# Altium PCB demoboard.PcbDoc (part 1 of 2)
Units mil, origin at the board's own origin, x right, y up, seen from the top; angles counter-clockwise.
Board outline 2372.23 x 2372.23 mil, 2 copper layers (Top Layer, Bottom Layer); 93 components, 94 nets, 539 pads, 0 vias.
Unrouted connection lines stored in the file: 66.
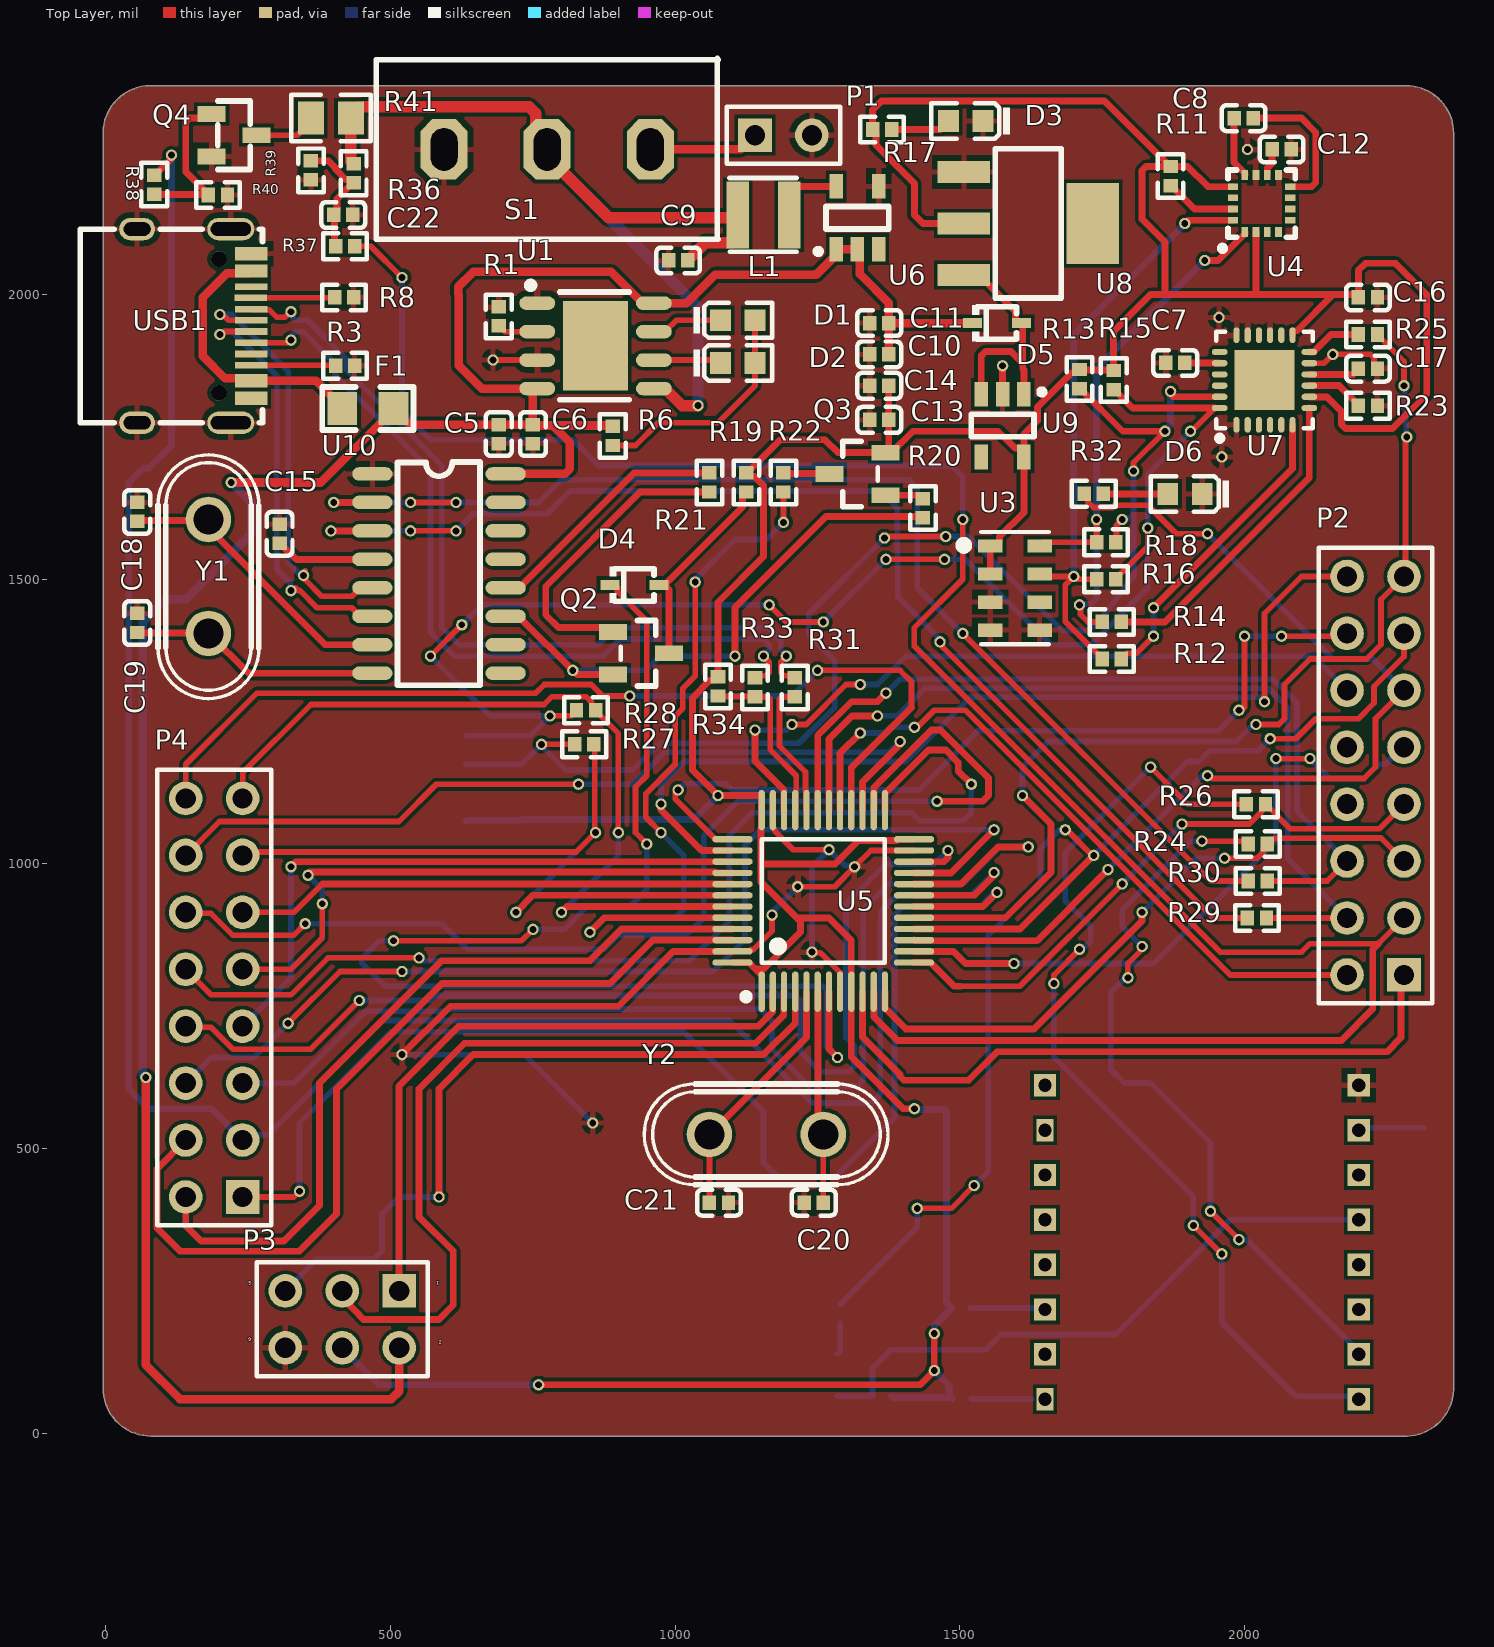
[diagram p0: Top Layer view]
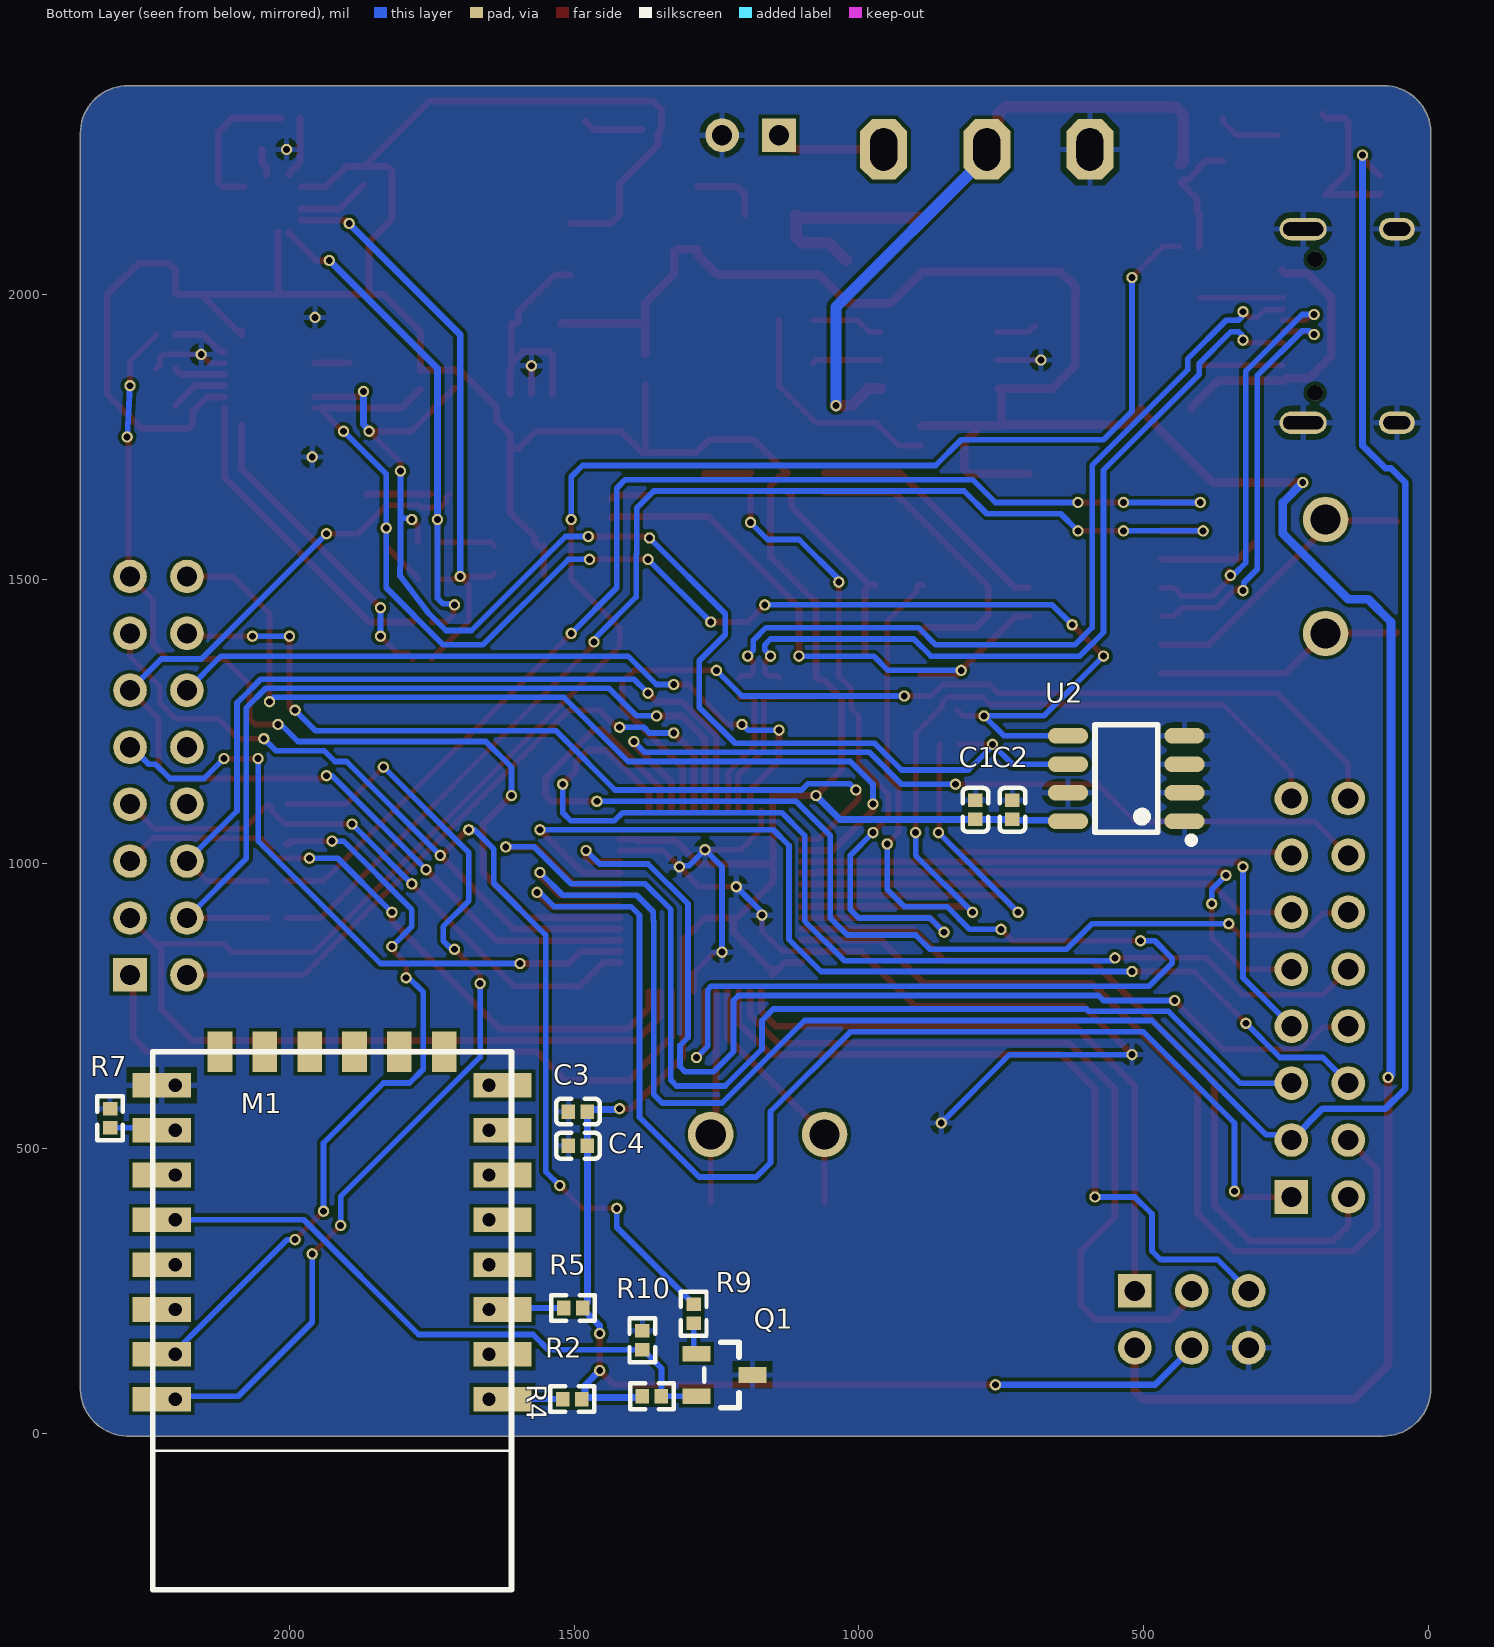
[diagram p1: Bottom Layer view, seen from below]

## Layer stack, top to bottom
Top Solder: solder mask 0.4, Solder Resist, Dk 3.5
Top Layer: signal copper 1.4
Dielectric 1: dielectric 12.6, FR-4, Dk 4.8
Bottom Layer: signal copper 1.4
Bottom Solder: solder mask 0.4, Solder Resist, Dk 3.5

## Board outline
-5.01,78.74 cw(c0,78.74) -4.98,79.37 cw(c0,80) -5.01,80 -5.01,2285 cw(c0,2285) -4.99,2285.5 cw(c78.74,2283.46) 76.71,2367.2 cw(c77.2,2362.2) 77.2,2367.22 2283.46,2367.22 cw(c2283.46,2283.46) 2367.22,2283.46 cw(c2362.2,2283.46) 2367.22,2283.43 2367.22,77.2 cw(c2362.2,77.2) 2367.2,76.71 cw(c2283.46,78.74) 2285.5,-4.99 cw(c2285,0) 2285,-5.01 80,-5.01 cw(c80,0) 79.37,-4.98 cw(c78.74,0) 78.74,-5.01 cw(c78.74,78.74)

## Design rules (kind name [scope] priority, off if disabled: settings)
Clearance [All] p1: gap=6 ignorepadtopadclearanceinfootprint=TRUE except(0: Arc-Hole Track-Hole SMDPad-Hole THPad-Hole Via-Hole Fill-Hole Poly-Hole Region-Hole Text-Hole)
ComponentClearance [All] p1: gap=0 collisioncheckmode=3 verticalgap=0 showdistances=FALSE
DiffPairsRouting [All] p1: maxlimit=10 minlimit=10 mostfreqgap=10 toplayer_minwidth=10 toplayer_maxwidth=15 toplayer_prefwidth=10 bottomlayer_minwidth=10 bottomlayer_maxwidth=15 bottomlayer_prefwidth=10 maxuncoupledlength=500
HoleSize [All] p1: absolutevalues=TRUE maxlimit=100 minlimit=10 maxpercent=80.000 minpercent=20.000
HoleToHoleClearance [All] p1: gap=4 allowstackedmicrovias=TRUE
MatchedLengths [InNetClass('等长')] p1: tolerance=10 checknetsindiffpair=FALSE checkdiffpairvsdiffpair=TRUE checkxsignals=TRUE checkothers=TRUE
MinimumSolderMaskSliver [All] p1 off: minsoldermaskwidth=4
PolygonConnect [All] p1: thpad.connectstyle=Relief thpad.reliefconductorwidth=10 thpad.reliefentries=4 thpad.polygonreliefangle="90 Angle" thpad.airgapwidth=10 smdpad.connectstyle=Relief smdpad.reliefconductorwidth=10 smdpad.reliefentries=4 smdpad.polygonreliefangle="90 Angle" smdpad.airgapwidth=10 via.connectstyle=Direct via.reliefconductorwidth=10 via.reliefentries=4 via.polygonreliefangle="90 Angle" via.airgapwidth=10
RoutingVias [All] p1: holewidth=12 width=24 viastyle="Through Hole" minholewidth=12 minwidth=24 maxholewidth=15 maxwidth=25
SilkToSilkClearance [All] p1: silktosilkclearance=1
SilkToSolderMaskClearance [IsPad] p1 off: minsilkscreentomaskgap=1 clearancetoexposedcopper=TRUE
SolderMaskExpansion [All] p1: expansion=4 istentingtop=FALSE
Width SWITCH [InNet('NetP1_1')] p1: maxlimit=15 minlimit=15 preferedwidth=15
Width 3V3 [InNet('3V3')] p2: maxlimit=12 minlimit=12 preferedwidth=12
Width bat+ [InNet('BAT+')] p3: maxlimit=20 minlimit=20 preferedwidth=20
Width 5VD [InNet('5VD')] p4: maxlimit=30 minlimit=15 preferedwidth=15
Width VBUS [InNet('VBUS')] p5: maxlimit=50 minlimit=15 preferedwidth=15
Width [All] p6: maxlimit=50 minlimit=10 preferedwidth=10
23 further rules are at their usual default settings.

## Components (designator, comment, footprint, x,y, rotation, side; value= is the part's Value field where it differs from the comment)
C1 "2.2nF (222) 10% 50V" 0402_C 795,1095 r270 bottom
C2 "0.1uF (105) 10% 25V" 0402_C 730,1095 r270 bottom
C3 "10uF (106) 20% 6.3V" 0402_C 1493.27,565 r180 bottom
C4 "100nF (104) 10% 16V" 0402_C 1493.27,505 r180 bottom
C5 "10uF (106) 20% 6.3V" 0402_C 690,1755 r90 top
C6 "100nF (104) 10% 16V" 0402_C 750,1755 r90 top
C7 "2.2nF (222) 10% 50V" 0402_C 1878.27,1880 r180 top
C8 "2.2nF (222) 10% 50V" 0402_C 1998.27,2310 r0 top
C9 "10uF (106) 20% 6.3V" 0402_C 1005,2060 r0 top
C10 "10uF (106) 20% 6.3V" 0402_C 1358.27,1895 r0 top
C11 "100nF (104) 10% 16V" 0402_C 1358.27,1950 r0 top
C12 "4.7uF (475) 20% 10V" 0402_C 2065,2255 r180 top
C13 "100nF (104) 10% 16V" 0402_C 1358.27,1780 r180 top
C14 "10uF (106) 20% 6.3V" 0402_C 1358.27,1840 r180 top
C15 "100nF (104) 10% 16V" 0402_C 305,1580 r90 top
C16 "2.2nF (222) 10% 50V" 0402_C 2216.73,1995 r180 top
C17 "0.1uF (105) 10% 25V" 0402_C 2216.73,1870 r180 top
C18 "22pF (220) 5% 50V" 0402_C 55,1618.27 r270 top
C19 "22pF (220) 5% 50V" 0402_C 55,1423.27 r270 top
C20 "22pF (220) 5% 50V" 0402_C 1243.27,405 r0 top
C21 "22pF (220) 5% 50V" 0402_C 1076.73,405 r180 top
C22 "2.2nF (222) 10% 50V" 0402_C 416.73,2140 r0 top
D1 "白灯 0603" 0603_LED_S1 1109.68,1955 r0 top
D2 "白灯 0603" 0603_LED_S1 1109.68,1880 r0 top
D3 "白灯 0603" 0603_LED_S1 1510,2305 r180 top
D4 "1N4148WS T4" SOD-323_L1.8-W1.3-LS2.5-RD 928.21,1490 r0 top
D5 "1N4148WS T4" SOD-323_L1.8-W1.3-LS2.5-RD 1565,1950 r0 top
D6 "白灯 0603" 0603_LED_S1 1895.32,1650 r180 top
F1 "ASMD0805-050" F0805 460.02,1800 r0 top
L1 "10uH" IND-SMD_L3.0-W3.0_SWPA3010S 1155,2140 r180 top
M1 "ESP-12E&F Module" "ESP-12E&F Module" 1925,365 r0 bottom
P1 "Header 2" HDR2X1_A 1140,2280 r0 top
P2 "Header 8X2A" HDR8X2_A1 2280,805 r90 top
P3 "Header 3X2" HDR2X3 515,250 r180 top
P4 "Header 8X2A" HDR8X2_A1 240,415 r90 top
Q1 "SS8050 Y1" SOT-23(SOT-23-3) 1235.79,102.4 r0 bottom
Q2 "SS8050 Y1" SOT-23(SOT-23-3) 940,1370 r180 top
Q3 "SS8550 Y2" SOT-23(SOT-23-3) 1320,1685 r0 top
Q4 "SI2302" SOT-23-3_L2.9-W1.3-P1.90-LS2.4-BR 225,2280 r180 top
R1 "1.2KΩ (1201) ±1%" 0402_R 690,1961.73 r270 top
R2 "10KΩ (1002) ±1%" 0402_R 1503.27,60 r0 bottom
R3 "5.1KΩ (5101) ±1%" 0402_R 420,1875 r180 top
R4 "10KΩ (1002) ±1%" 0402_R 1363.27,65 r0 bottom
R5 "10KΩ (1002) ±1%" 0402_R 1501.73,220 r0 bottom
R6 "1KΩ (1001) ±1%" 0402_R 890,1751.73 r270 top
R7 "10KΩ (1002) ±1%" 0402_R 2315,553.27 r90 bottom
R8 "5.1KΩ (5101) ±1%" 0402_R 418.27,1995 r180 top
R9 "1KΩ (1001) ±1%" 0402_R 1290,210 r90 bottom
R10 "0Ω (0R0) ±1%" 0402_R 1380,163.27 r270 bottom
R11 "3.9KΩ(3901) ±1%" 0402_R 1870,2208.27 r90 top
R12 "0Ω (0R0) ±1%" 0402_R 1766.73,1360 r180 top
R13 "4.7KΩ (4701) ±1%" 0402_R 1710,1851.73 r270 top
R14 "0Ω (0R0) ±1%" 0402_R 1766.73,1425 r180 top
R15 "4.7KΩ (4701) ±1%" 0402_R 1770,1850 r90 top
R16 "0Ω (0R0) ±1%" 0402_R 1756.73,1500 r180 top
R17 "1KΩ (1001) ±1%" 0402_R 1363.27,2290 r0 top
R18 "0Ω (0R0) ±1%" 0402_R 1756.73,1565 r180 top
R19 "10KΩ (1002) ±1%" 0402_R 1125,1670 r90 top
R20 "1KΩ (1001) ±1%" 0402_R 1435,1625 r90 top
R21 "1KΩ (1001) ±1%" 0402_R 1060,1670 r270 top
R22 "1KΩ (1001) ±1%" 0402_R 1190,1670 r90 top
R23 "4.7KΩ (4701) ±1%" 0402_R 2216.73,1805 r0 top
R24 "0Ω (0R0) ±1%" 0402_R 2023.27,1035 r0 top
R25 "0Ω (0R0) ±1%" 0402_R 2216.73,1930 r0 top
R26 "0Ω (0R0) ±1%" 0402_R 2020,1105 r0 top
R27 "0Ω (0R0) ±1%" 0402_R 840,1210 r180 top
R28 "0Ω (0R0) ±1%" 0402_R 843.27,1270 r180 top
R29 "0Ω (0R0) ±1%" 0402_R 2021.73,905 r0 top
R30 "0Ω (0R0) ±1%" 0402_R 2023.27,970 r0 top
R31 "22Ω (22R0) ±1%" 0402_R 1210,1310 r270 top
R32 "0Ω (0R0) ±1%" 0402_R 1735,1650 r0 top
R33 "22Ω (22R0) ±1%" 0402_R 1140,1310 r270 top
R34 "1.5KΩ (1501) ±1%" 0402_R 1075,1311.73 r270 top
R36 "33KΩ (3302) ±1%" 0402_R 435,2213.27 r90 top
R37 "0Ω (0R0) ±1%" 0402_R 420,2085 r180 top
R38 "0Ω (0R0) ±1%" 0402_R 85,2193.27 r270 top
R39 "33KΩ (3302) ±1%" 0402_R 360,2218.27 r90 top
R40 "33KΩ (3302) ±1%" 0402_R 196.73,2175 r180 top
R41 "100KΩ (1003) ±1%" 0805_R 395,2310 r0 top
S1 "SW-SPDT" SWITCH_A1 593.9,2255 r0 top
U1 "TP4056" SOP-8_EP_150mil 860,1910 r270 top
U2 "M24C64-RMN6TP" SOIC-8_150mil 530,1150 r90 bottom
U3 "MS5611" "MS5611 - duplicate" 1596.69,1484.61 r0 top
U4 "HWC5883L" LPCC-16_L3.0-W3.0-P0.50-BL 2030,2160 r0 top
U5 "STM32F103CBT6" LQFP-48_7x7x05P 1260,935 r0 top
U6 "HT7750SA" SOT-23-5 1320,2135 r270 top
U7 "MPU-6050" QFN-24_4x4x05P 2035,1850 r0 top
U8 "AMS1117-3.3_C369933" SOT-223-3_L6.5-W3.4-P2.30-LS7.0-BR 1620,2125 r180 top
U9 "MIC5205-3.3YM5" SOT-23-5 1575,1770 r90 top
U10 "CH340G" SOIC-16_L9.9-W3.9-P1.27-LS6.0-BR 585,1510 r180 top
USB1 "TYPEC-304-BCP16" USB-C-SMD_TYPEC-304-BCP16 155,1945 r270 top
Y1 "XTAL" XTAL_socket 180,1505 r90 top
Y2 "8M" XTAL_socket 1160,525 r0 top

## Footprints (in the part's own frame and the unit in brackets; to place one, negate y for a bottom-side part, rotate by r counter-clockwise, add the part's x,y. Pads: shape width x height; smd on the part's side, far side on the other; paste and mask are expansions set on the pad)
0402_C [mm]
  rect 0.6x0.65 smd mask+0.051: 1(-0.425,0) 2(0.425,0)
  silkscreen extent -0.97,-0.58 0.98,0.58, body extent -0.48,-0.3 0.52,0.3, height 0.2
0402_R [mm]
  rect 0.6x0.65 smd mask+0.051: 1(-0.425,0) 2(0.425,0)
  silkscreen extent -0.97,-0.58 0.98,0.58, body extent -0.57,-0.27 0.58,0.28, height 0.41
0603_LED_S1 [mm]
  rect 0.93x0.98 smd: A(0.77,0) K(-0.77,0)
  silkscreen extent -1.98,-0.79 1.54,0.79, body extent -0.8,-0.4 0.8,0.4, height 0.6
0805_R [mm]
  rect 1.16x1.47 smd: 1(-0.89,0) 2(0.89,0)
  silkscreen extent -1.77,-1.04 1.77,1.03, body extent -1,-0.62 1,0.63, height 0.49
"ESP-12E&F Module" [mm]
  rect 2.6x1.1 smd: 1(-7.6,7.75) 2(-7.6,5.75) 3(-7.6,3.75) 4(-7.6,1.75) 5(-7.6,-0.25) 6(-7.6,-2.25) 7(-7.6,-4.25) 8(-7.6,-6.25) 15(7.6,-6.25) 16(7.6,-4.25) 17(7.6,-2.25) 18(7.6,-0.25) 19(7.6,1.75) 20(7.6,3.75) 21(7.6,5.75) 22(7.6,7.75)
  rect 0.762x1 hole 0.6: 1(-7,7.75) 7(-7,-4.25)
  rect 0.762x1 / inner rect 0.762x1 / far side rect 1x1 hole 0.6: 2(-7,5.75) 3(-7,3.75) 4(-7,1.75) 5(-7,-0.25) 6(-7,-2.25) 8(-7,-6.25) 15(7,-6.25) 16(7,-4.25) 17(7,-2.25) 18(7,-0.25) 19(7,1.75) 20(7,3.75) 21(7,5.75) 22(7,7.75)
  rect 1.1x1.8 smd: 9(-5,-7.75) 10(-3,-7.75) 11(-1,-7.75) 12(1,-7.75) 13(3,-7.75) 14(5,-7.75)
  silkscreen extent -8,-7.75 8,16.25
F0805 [mm]
  rect 1.335x1.458 smd: 1(-1.142,0) 2(1.142,0)
  silkscreen extent -2.04,-0.96 2.04,0.96
HDR2X1_A [mm] "Connector; Header; 2 Position"
  rect 1.5x1.5 hole 0.9: 1(0,0)
  round 1.5 hole 0.9: 2(2.54,0)
  silkscreen extent -1.27,-1.27 3.81,1.27
HDR2X3 [mm] "Connector; Header; 3x2 Position"
  rect 1.5x1.5 hole 0.9: 1(0,0)
  round 1.5 hole 0.9: 2(0,2.54) 3(2.54,0) 4(2.54,2.54) 5(5.08,0) 6(5.08,2.54)
  silkscreen extent -1.27,-1.27 6.35,3.81, body extent -1.27,-1.27 6.35,3.81, height 7.58
HDR8X2_A1 [mm] "Connector; Header; 8x2 Position"
  rect 1.5x1.5 hole 0.9: 1(0,0)
  round 1.5 hole 0.9: 2(0,2.54) 3(2.54,0) 4(2.54,2.54) 5(5.08,0) 6(5.08,2.54) 7(7.62,0) 8(7.62,2.54) 9(10.16,0) 10(10.16,2.54) 11(12.7,0) 12(12.7,2.54) 13(15.24,0) 14(15.24,2.54) 15(17.78,0) 16(17.78,2.54)
  silkscreen extent -1.27,-1.27 19.05,3.81
IND-SMD_L3.0-W3.0_SWPA3010S [mm]
  rect 1x3 smd: 1(1.15,0) 2(-1.15,0)
  silkscreen extent -1.49,-1.65 1.52,1.64
LPCC-16_L3.0-W3.0-P0.50-BL [mm]
  rect 0.3x0.45 smd: 1(-0.749,-1.275) 2(-0.249,-1.275) 3(0.251,-1.275) 4(0.751,-1.275) 9(0.75,1.275) 10(0.25,1.275) 11(-0.25,1.275) 12(-0.749,1.275)
  rect 0.45x0.3 smd: 5(1.275,-0.748) 6(1.275,-0.248) 7(1.275,0.252) 8(1.275,0.752) 13(-1.275,0.752) 14(-1.275,0.252) 15(-1.275,-0.248) 16(-1.275,-0.748)
  silkscreen extent -1.87,-2.12 1.5,1.5
LQFP-48_7x7x05P [mm]
  oval 0.28x1.8 smd mask+0.051: 1(-2.75,-4.05) 2(-2.25,-4.05) 3(-1.75,-4.05) 4(-1.25,-4.05) 5(-0.75,-4.05) 6(-0.25,-4.05) 7(0.25,-4.05) 8(0.75,-4.05) 9(1.25,-4.05) 10(1.75,-4.05) 11(2.25,-4.05) 12(2.75,-4.05) 25(2.75,4.05) 26(2.25,4.05) 27(1.75,4.05) 28(1.25,4.05) 29(0.75,4.05) 30(0.25,4.05) 31(-0.25,4.05) 32(-0.75,4.05) 33(-1.25,4.05) 34(-1.75,4.05) 35(-2.25,4.05) 36(-2.75,4.05)
  oval 1.8x0.28 smd mask+0.051: 13(4.05,-2.75) 14(4.05,-2.25) 15(4.05,-1.75) 16(4.05,-1.25) 17(4.05,-0.75) 18(4.05,-0.25) 19(4.05,0.25) 20(4.05,0.75) 21(4.05,1.25) 22(4.05,1.75) 23(4.05,2.25) 24(4.05,2.75) 37(-4.05,2.75) 38(-4.05,2.25) 39(-4.05,1.75) 40(-4.05,1.25) 41(-4.05,0.75) 42(-4.05,0.25) 43(-4.05,-0.25) 44(-4.05,-0.75) 45(-4.05,-1.25) 46(-4.05,-1.75) 47(-4.05,-2.25) 48(-4.05,-2.75)
  silkscreen extent -3.6,-4.42 2.75,2.75, body extent -4.5,-4.5 4.5,4.5, height 1.6
"MS5611 - duplicate" [mm]
  rect 1.1x0.6 smd: 1(-1.1,1.875) 2(-1.1,0.625) 3(-1.1,-0.625) 4(-1.1,-1.875) 5(1.1,-1.875) 6(1.1,-0.625) 7(1.1,0.625) 8(1.1,1.875)
  silkscreen extent -2.41,-2.5 1.5,2.5
QFN-24_4x4x05P [mm]
  rect 2.68x2.68 smd mask+0.051: 0(0,0)
  oval 0.28x0.7 smd mask+0.051: 1(-1.25,-2) 2(-0.75,-2) 3(-0.25,-2) 4(0.25,-2) 5(0.75,-2) 6(1.25,-2) 13(1.25,2) 14(0.75,2) 15(0.25,2) 16(-0.25,2) 17(-0.75,2) 18(-1.25,2)
  oval 0.7x0.28 smd mask+0.051: 7(2,-1.25) 8(2,-0.75) 9(2,-0.25) 10(2,0.25) 11(2,0.75) 12(2,1.25) 19(-2,1.25) 20(-2,0.75) 21(-2,0.25) 22(-2,-0.25) 23(-2,-0.75) 24(-2,-1.25)
  silkscreen extent -2.15,-2.72 2.15,2.15
SOD-323_L1.8-W1.3-LS2.5-RD [mm]
  rect 0.845x0.455 smd: 1(-1.098,0) 2(1.098,0)
  silkscreen extent -1.1,-0.8 0.88,0.8
SOIC-8_150mil [mm]
  oval 0.7x1.8 smd: 1(-1.905,-2.6) 2(-0.635,-2.6) 3(0.635,-2.6) 4(1.905,-2.6) 5(1.905,2.6) 6(0.635,2.6) 7(-0.635,2.6) 8(-1.905,2.6)
  silkscreen extent -2.9,-3.05 2.4,1.4
SOIC-16_L9.9-W3.9-P1.27-LS6.0-BR [mm]
  oval 1.8x0.6 smd: 1(2.972,-4.445) 2(2.972,-3.175) 3(2.972,-1.905) 4(2.972,-0.635) 5(2.972,0.635) 6(2.972,1.905) 7(2.972,3.175) 8(2.972,4.445) 9(-2.972,4.445) 10(-2.972,3.175) 11(-2.972,1.905) 12(-2.972,0.635) 13(-2.972,-0.635) 14(-2.972,-1.905) 15(-2.972,-3.175) 16(-2.972,-4.445)
  silkscreen extent -1.83,-4.98 1.85,4.98
SOP-8_EP_150mil [mm]
  rect 4x2.9 smd: 0(0,0)
  oval 0.6x1.6 smd: 1(-1.905,-2.6) 2(-0.635,-2.6) 3(0.635,-2.6) 4(1.905,-2.6) 5(1.905,2.6) 6(0.635,2.6) 7(-0.635,2.6) 8(-1.905,2.6)
  silkscreen extent -2.85,-3.05 2.4,1.5
SOT-23(SOT-23-3) [mm]
  rect 1.25x0.7 smd: 1(1.25,-0.95) 2(1.25,0.95) 3(-1.25,0)
  silkscreen extent -0.65,-1.46 0.9,1.46, body extent -1.5,-1.5 1.5,1.5, height 1.3
SOT-23-3_L2.9-W1.3-P1.90-LS2.4-BR [mm]
  rect 1.25x0.7 smd: 1(1,-0.95) 2(1,0.95) 3(-1,0)
  silkscreen extent -0.73,-1.53 0.73,1.53
SOT-23-5 [mm]
  rect 1.1x0.6 smd: 1(1.4,-0.95) 2(1.4,0) 3(1.4,0.95) 4(-1.4,0.95) 5(-1.4,-0.95)
  silkscreen extent -0.5,-1.87 1.62,1.4
SOT-223-3_L6.5-W3.4-P2.30-LS7.0-BR [mm]
  rect 2.34x0.98 smd: 1(2.87,-2.3) 2(2.87,0) 3(2.87,2.3)
  rect 2.34x3.6 smd: 4(-2.87,0)
  silkscreen extent -1.47,-3.33 1.47,3.33
SWITCH_A1 [mm] "扭子开关"
  oct 2.1x2.7 hole 1.2 slot 1.9 at 90 deg: 1(0,0) 2(4.6,0) 3(9.2,0)
  silkscreen extent -3.02,-4 12.22,4.06
USB-C-SMD_TYPEC-304-BCP16 [mm]
  oval 1x2.1 hole 0.6 slot 1.8 at 90 deg: 13(-4.32,1.633) 14(4.32,1.633)
  oval 1x1.6 hole 0.6 slot 1.2 at 90 deg: 15(-4.32,-2.547) 16(4.32,-2.547)
  rect 0.6x1.45 smd: A1B12(-3.225,2.547) A4B9(-2.45,2.547) B1A12(3.22,2.547) B4A9(2.45,2.547)
  rect 0.3x1.45 smd: A5(-1.26,2.532) A6(-0.25,2.547) A7(0.25,2.547) A8(1.25,2.547) B5(1.75,2.547) B6(0.75,2.547) B7(-0.75,2.547) B8(-1.75,2.547)
  round 0.7 hole 0.7 unplated: ""(-2.98,1.102) ""(2.98,1.102)
  silkscreen extent -4.32,-5.08 4.32,3.05
XTAL_socket [mil]
  round 80 hole 53: 1(100,0) 2(-100,0)
  silkscreen extent -215,-89 214,89, body extent -214,-89 214,89, height 102

## Part data
C1 C7 C8 C16 C22: library part "0402 2.2nF (222) 10% 50V", "贴片电容", Package=0402, SuppliersPartNumber=C1531, ComponentLink1Description=供应商链接, ComponentLink1URL=http://www.szlcsc.com/product/details_1883.html, Supplier=LC
C2 C17: library part "0402 1.0uF (105) 10% 25V", "贴片电容", Package=0402, SuppliersPartNumber=C52923, ComponentLink1Description=供应商链接, ComponentLink1URL=http://www.szlcsc.com/product/details_53938.html, Supplier=LC
C3 C5 C9 C10 C14: library part "0402 10uF (106) 20% 6.3V", "贴片电容", Package=0402, SuppliersPartNumber=C15525, ComponentLink1Description=供应商链接, ComponentLink1URL=http://www.szlcsc.com/product/details_16204.html, Supplier=LC
C4 C6 C11 C13 C15: library part "0402 100nF (104) 10% 16V", "贴片电容", Package=0402, SuppliersPartNumber=C1525, ComponentLink1Description=供应商链接, ComponentLink1URL=http://www.szlcsc.com/product/details_1877.html, Supplier=LC
C12: library part "0402 4.7uF (475) 20% 10V", "贴片电容", Package=0402, SuppliersPartNumber=C23733, ComponentLink1Description=供应商链接, ComponentLink1URL=http://www.szlcsc.com/product/details_24469.html, Supplier=LC
C18 C19 C20 C21: library part "0402 22pF (220) 5% 50V", "贴片电容", Package=0402, SuppliersPartNumber=C1555, ComponentLink1Description=供应商链接, ComponentLink1URL=http://www.szlcsc.com/product/details_1907.html, Supplier=LC
D1 D2 D3 D6: library part "0603 白灯", "发光二极管", Package=0603, SuppliersPartNumber=C2290, ComponentLink1Description=供应商链接, ComponentLink1URL=http://www.szlcsc.com/product/details_2663.html, Supplier=LC
D4 D5: library part "SOD-323 1N4148WS T4", "二极管", Package=SOD-323, SuppliersPartNumber=C2128, ComponentLink1Description=供应商链接, ComponentLink1URL=http://www.szlcsc.com/product/details_2485.html, Supplier=LC
F1: BOM_Manufacturer=JDTFUSE, BOM_Manufacturer Part=ASMD0805-050, BOM_Supplier=LCSC, BOM_Supplier Part=C135329, Contributor=LCSC, spicePre=F, spiceSymbolName=ASMD0805-050
L1: BOM_JLCPCB Part Class="Extended Part", BOM_Manufacturer=Sunlord, BOM_Manufacturer Part=SWPA3012S100MT, BOM_Supplier=LCSC, BOM_Supplier Part=C48668, nameAlias=Inductance, spicePre=L, spiceSymbolName=SWPA3012S100MT
P1 P2 P4: "接插件", LatestRevisionDate=17-Jul-2002, LatestRevisionNote="Re-released for DXP Platform.", Publisher="Altium Limited"
P3: "Header, 3-Pin, Dual row", LatestRevisionDate=17-Jul-2002, LatestRevisionNote="Re-released for DXP Platform.", Publisher="Altium Limited"
Q1 Q2: library part "SOT-23 SS8050 Y1", "三极管", Package=SOT-23, SuppliersPartNumber=C2150, ComponentLink1Description=供应商链接, ComponentLink1URL=http://www.szlcsc.com/product/details_2507.html, Supplier=LC
Q3: library part "SOT-23 SS8550 Y2", "三极管", Package=SOT-23, SuppliersPartNumber=C8542, ComponentLink1Description=供应商链接, ComponentLink1URL=http://www.szlcsc.com/product/details_9037.html, Supplier=LC
Q4: BOM_JLCPCB Part Class="Extended Part", BOM_Manufacturer=Hottech, BOM_Manufacturer Part=SI2302, BOM_Supplier=LCSC, BOM_Supplier Part=C181087, Contributor=LCSC, JLCPCB Part Class="Extended Part", spicePre=Q, spiceSymbolName=SI2302
R1: library part "0402 1.2KΩ (1201) 1%", "贴片电阻", Package=0402, SuppliersPartNumber=C25862, ComponentLink1Description=供应商链接, ComponentLink1URL=http://www.szlcsc.com/product/details_26605.html, Supplier=LC
R2 R4 R5 R7 R19: library part "0402 10KΩ (1002) 1%", "贴片电阻", Package=0402, SuppliersPartNumber=C25744, ComponentLink1Description=供应商链接, ComponentLink1URL=http://www.szlcsc.com/product/details_26487.html, Supplier=LC
R3 R8: library part "0402 5.1KΩ (5101) 1%", "贴片电阻", Package=0402, SuppliersPartNumber=C25905, ComponentLink1Description=供应商链接, ComponentLink1URL=http://www.szlcsc.com/product/details_26648.html, Supplier=LC
R6 R9 R17 R20 R21 R22: library part "0402 1KΩ (1001) 1%", "贴片电阻", Package=0402, SuppliersPartNumber=C11702, ComponentLink1Description=供应商链接, ComponentLink1URL=http://www.szlcsc.com/product/details_12256.html, Supplier=LC
R10 R12 R14 R16 R18 R24 R25 R26 R27 R28 R29 R30 R32 R37 R38: library part "0402 0Ω (0R0) 1%", "贴片电阻", Package=0402, SuppliersPartNumber=C17168, ComponentLink1Description=供应商链接, ComponentLink1URL=http://www.szlcsc.com/product/details_17853.html, Supplier=LC
R11: library part "0402 3.9KΩ(3901) 1%", "贴片电阻", Package=0402, SuppliersPartNumber=C51721, ComponentLink1Description=供应商链接, ComponentLink1URL=http://www.szlcsc.com/product/details_52734.html, Supplier=LC
R13 R15 R23: library part "0402 4.7KΩ (4701) 1%", "贴片电阻", Package=0402, SuppliersPartNumber=C25900, ComponentLink1Description=供应商链接, ComponentLink1URL=http://www.szlcsc.com/product/details_26643.html, Supplier=LC
R31 R33: library part "0402 22Ω (22R0) 1%", "贴片电阻", Package=0402, SuppliersPartNumber=C25092, ComponentLink1Description=供应商链接, ComponentLink1URL=http://www.szlcsc.com/product/details_25835.html, Supplier=LC
R34: library part "0402 1.5KΩ (1501) 1%", "贴片电阻", Package=0402, SuppliersPartNumber=C25867, ComponentLink1Description=供应商链接, ComponentLink1URL=http://www.szlcsc.com/product/details_26610.html, Supplier=LC
R36 R39 R40: library part "0402 33KΩ (3302) 1%", "贴片电阻", Package=0402, SuppliersPartNumber=C25779, ComponentLink1Description=供应商链接, ComponentLink1URL=http://www.szlcsc.com/product/details_26522.html, Supplier=LC
R41: library part "0805 100KΩ (1003) 1%", "贴片电阻", Package=0805, SuppliersPartNumber=C17407, ComponentLink1Description=供应商链接, ComponentLink1URL=http://www.szlcsc.com/product/details_18095.html, Supplier=LC
S1: "开关", ComponentLink1Description="Manufacturer Link", ComponentLink1URL=http://www.apem.com, DatasheetDocument=05-Dec-2000, LatestRevisionDate=17-Dec-2003, LatestRevisionNote="Schematic revised, PCB Footprint replaced.", PackageReference=TL36WW15050, Published=24-Mar-1999, Publisher="Altium Limited"
U1: library part TP4056_[C16581], "电池电源管理", Package=SOP-8_EP_150mil, SuppliersPartNumber=C16581, ComponentLink1Description=供应商链接, ComponentLink1URL=http://www.szlcsc.com/product/details_17264.html, Supplier=LC
U2: "EEPROM", Package=SOIC-8_150mil, SuppliersPartNumber=C79988, ComponentLink1Description=供应商链接, ComponentLink1URL=http://www.szlcsc.com/product/details_81133.html, Supplier=LC
U4: library part HMC5883L
U5: "ARM", Package=LQFP-48_7x7x05P, SuppliersPartNumber=C8304, ComponentLink1Description=供应商链接, ComponentLink1URL=http://www.szlcsc.com/product/details_8796.html, Supplier=LC
U6: BOM_JLCPCB Part Class="Extended Part", BOM_Manufacturer="Holtek Semicon", BOM_Manufacturer Part=HT7750SA, BOM_Supplier=LCSC, BOM_Supplier Part=C192571, Contributor=LCSC, spicePre=U, spiceSymbolName=HT7750SA
U7: "传感器", Package=QFN-24_4x4x05P, SuppliersPartNumber=C24112, ComponentLink1Description=供应商链接, ComponentLink1URL=http://www.szlcsc.com/product/details_24852.html, Supplier=LC
U8: BOM_Manufacturer=KEXIN, BOM_Manufacturer Part=AMS1117-3.3, BOM_Paste Type=expand, BOM_Supplier=LCSC, BOM_Supplier Part=C369933, Contributor=LCSC, spicePre=U, spiceSymbolName=AMS1117-3.3_C369933
U9: BOM_JLCPCB Part Class="Extended Part", BOM_Manufacturer=MICROCHIP, BOM_Manufacturer Part=MIC5205-3.3YM5, BOM_Supplier=LCSC, BOM_Supplier Part=C37970, image=//image.lceda.cn/szlcsc/C37970.jpg, spicePre=U, spiceSymbolName=MIC5205-3.3YM5
U10: "USB", Package=SOIC-16_150mil, SuppliersPartNumber=C14267, ComponentLink1Description=供应商链接, ComponentLink1URL=http://www.szlcsc.com/product/details_14927.html, Supplier=LC
USB1: BOM_Manufacturer=XUNPU, BOM_Manufacturer Part=TYPEC-304-BCP16, BOM_Supplier=LCSC, BOM_Supplier Part=C720629, Contributor=LCSC, spicePre=U, spiceSymbolName=TYPEC-304-BCP16
Y1: "Crystal Oscillator", LatestRevisionDate=17-Jul-2002, LatestRevisionNote="Re-released for DXP Platform.", PackageDescription="Crystal, Thru-Hole; 2 Leads; Body 3.1 x 8.2 mm (Dia.xH)", PackageReference=R38, Published=8-Jun-2000, Publisher="Altium Limited"
Y2: library part XTAL, "Crystal Oscillator", LatestRevisionDate=17-Jul-2002, LatestRevisionNote="Re-released for DXP Platform.", PackageDescription="Crystal, Thru-Hole; 2 Leads; Body 3.1 x 8.2 mm (Dia.xH)", PackageReference=R38, Published=8-Jun-2000, Publisher="Altium Limited"

## Free pads (board coordinates)
  round 20 hole 12: 2(1040,1805) 3(1575,1875) 4(347.14,1506.82) 5(325,1480) 6(200,1965) 7(200,1930) 8(400,1635) 9(395,1585) 11(325,1970) 12(325,1920) 13(1155,1365) 14(1195,1365) 15(1895,2125) 16(1930,2060) 17(115,2245) 18(1870,1830) 19(1860,1760) 20(520,2030) 21(1700,1505) 22(1740,1605) 23(1710,1455) 24(1805,1690) 26(2280,1840) 28(2285,1750) 29(1840,1400) 30(1840,1450) 31(1830,1590) 32(1905,1760) 33(1190,1600) 34(535,1635) 35(535,1585) 36(615,1635) 37(615,1585) 38(1035,1495) 40(1075,1120) 41(780,1260) 42(765,1210) 43(1475,1575) 44(1472.94,1535) 45(1367.5,1572.5) 46(1370,1535) 47(1260,1425) 48(1105,1365) 49(820,1340) 50(1165,1455) 51(625,1420) 52(570,1365) 53(220,1670) 55(720,915) 56(860,1055) 57(900,1055) 58(800,915) 59(1505,1605) 61(1935,1580) 62(950,1035) 63(975,1055) 64(1005,1130) 65(975,1105) 66(920,1295) 67(1250,1340) 68(1140,1235) 69(1205,1245) 70(830,1140) 71(1395,1215) 72(325,995) 73(355,980) 74(380,930) 75(850,880) 76(1325,1230) 78(1325,1315) 80(1355,1260) 81(1370,1300) 82(1505,1405) 83(1465,1390) 84(1460,1110) 85(750,885) 86(350,895) 87(585,415) 88(1270,1025) 89(1315,995) 90(1285,660) 91(505,865) 95(2035,1285) 96(2065,1400) 97(2000,1400) 98(1520,1140) 99(550,835) 100(70,625) 101(445,760) 102(1478.91,1023.5) 103(1990,1270) 104(1560,1060) 105(520,811) 106(320,720) 107(1620,1030) 108(1560,985) 109(340,425) 110(1565,950) 111(1420,570) 112(1455,175) 113(1455,110) 114(760,85) 115(1240,845) 118(1610,1120) 119(2020,1245) 120(1735,1015) 121(2045,1220) 122(1420,1240) 123(1760,990) 124(1935,1155) 125(1890,1070) 126(1965,1010) 127(1785,965) 128(1595,825) 129(2055,1185) 130(2115,1185) 131(1925,1040) 132(1820,915) 133(1835,1170) 135(1710,850) 136(1665,790) 137(1910,365) 138(1960,315) 139(1990,340) 140(1940,390) 141(1795,800) 142(1820,855) 143(1425,395) 144(1525,435) 145(1685,1060) 146(680,1885) 147(1955,1960) 148(1960,1715) 149(2005,2255) 150(2155,1895) 151(1785,1605) 154(520,665) 155(855,545) 156(1215,960) 157(1170,910)

## Nets (pads, with @x,y where several pads share a name; then routed paths per layer and width w, separated by ;. In a path a pad name is that pad's centre, name@x,y a point inside that pad or via, vN(x,y) a via of type N, cw(c..) or ccw(c..) an arc to the next point about the centre after c; other vN are vias at no path point)
3V3: C1.2 C2.2 C3.2 C4.2 C13.1 C14.1 C16.2 P3.4 pad.40 pad.111 pad.112 pad.113 pad.114 Q3.2 R2.1 R4.2 R5.1 R11.2 R13.1 R15.2 R17.1 R19.2 R34.1 U2.8 U3.1 U3.2 U4.2 U4.13 U5.1 U5.9 U5.24 U5.36 U5.48 U7.8 U7.13 U8.2 U9.5 | length 7997.4
  Top Layer w12: pad.114 1430,85 pad.113 pad.112 ; U5.48 1129.5,826.73 1140.37,815.86 ; 1151.73,811.73 1151.73,804.98 1151.24,804.98 1140.37,815.86 ; C14.1@1375,1840.98 C13.1 1375,1728.19 Q3.2 ; pad.111@1415,570 1400,570 1309.21,660.79 U5.9 1309.21,865.79 1270,905 1213.82,905 ; U5.24 1390.5,1043.27 1388.33,1041.09 1322.05,1041.09 1280.96,1000 1150.58,1000 ; U8.2 1435,2125 1420,2140 1420,2195 1352.35,2262.65 1352.35,2284.19 R17.1 1346.54,2324.51 1362.03,2340 1754.02,2340 R11.2@1869.02,2225 ; U3.2 U3.1 1563.23,1558.43 1569.04,1564.24 1569.04,1574.08 1612.4,1617.44 U9.5 U9.5@1612.4,1724.72 ; U4.13 1935.4,2189.6 1900,2225 R11.2 R11.2@1869.02,2225 ; U4.2 2020.22,2000.22 2020,2000 ; U7.13 2084.21,1936.03 2084.7,1936.52 2091.99,1936.52 2155.47,2000 ; U7.8 2114.23,1819.98 2145.02,1819.98 2170,1795 2170,1772.03 2177.03,1765 2260,1765 2320,1825 2320,2000 2265,2055 2212.03,2055 2200,2042.97 2200,2001.8 2198.2,2000 2155.47,2000 ; 1140.37,815.86 1155.86,815.86 1220,880 1220,898.82 1213.82,905 ; 1150.58,1000 1150.58,968.24 1213.82,905 ; 1150.58,1000 1150.58,1063.37 1151.24,1064.04 1151.24,1093.96 U5.36 1151.73,1119.51 1151.24,1120 pad.40 1030,1165 1030,1291.58 1061.08,1322.65 1069.19,1322.65 R34.1 1075,1459.64 1155,1539.64 1155,1665 1139.08,1680.92 1130.81,1680.92 R19.2 1125.98,1686.73 1184.25,1745 1262.89,1745 1285.49,1722.4 Q3.2 ; Q3.2 1380.04,1722.4 1417.64,1760 1567.28,1760 1596.75,1730.54 1606.59,1730.54 U9.5@1612.4,1724.72 ; U9.5@1612.4,1724.72 1612.4,1754.76 1636.21,1778.57 1636.21,1802.79 1696.08,1862.65 1704.19,1862.65 R13.1 1710.87,1867.6 1769.13,1867.6 R15.2 1770,1935 1835,2000 1860,2000 ; 1860,2000 2020,2000 ; 1860,2000 1860,2092.5 1820,2132.5 1820,2217.97 1827.03,2225 R11.2@1869.02,2225 ; 2020,2000 2155.47,2000
  Bottom Layer w12: P3.4 480,85 pad.114 ; U2.8 634,1076.63 728.37,1076.63 C2.2 C1.2 1033.27,1078.27 pad.40 ; R4.2 1382.5,62.5 R2.1@1484.04,62.5 ; pad.111 1421.53,568.47 1473.07,568.47 C3.2 C4.2 1476.54,229.45 1485,220.98 R5.1 1485,219.02 1455,189.02 pad.112 ; pad.113 1480.72,84.28 1480.72,65.81 R2.1@1484.04,62.5 ; R2.1 R2.1@1484.04,62.5
5VD: C5.2 C6.2 C10.2 C11.2 D5.1 F1.2 P3.2 pad.53 pad.100 R6.1 U1.4 U1.8 U6.1 U6.2 U10.16 | length 4648.9
  Top Layer w15: pad.100 70,120 130,60 501.21,60 515,73.79 P3.2 ; pad.53 377.42,1670 F1.2@505,1797.58 ; F1.2 F1.2@505,1797.58 ; U10.16 806.21,1685 815,1693.79 815,1740 785.3,1769.7 ; R6.1 888.37,1770.1 751.63,1770.1 C6.2 ; C10.2 C11.2 ; D5.1 C11.2 ; F1.2@505,1797.58 523.78,1778.8 526.2,1778.8 533.27,1771.73 C5.2 C6.2 ; C6.2 750,1831.02 753.98,1835 660,1835 620,1875 620,2000 618.71,2001.29 618.71,2013.71 645,2040 887.68,2040 942.68,1985 U1.8 1020,1985 1070,2035 1247.56,2035 1282.6,2070.04 U6.1 U6.2 1324.31,2075.57 1324.31,2035.98 1375,1985.3 C11.2
  Bottom Layer w15: pad.100 65,630 65,1425 105,1465 140,1465 255,1580 255,1635 pad.53
AUX_CL: R14.1 U7.7 | length 557.4
  Top Layer w12: R14.1 1860,1425 2113.74,1678.74 U7.7
AUX_DA: pad.29 pad.30 R12.1 U7.6 | length 546.1
  Top Layer w10: R12.1 1783.46,1360.98 1792.28,1369.8 1809.8,1369.8 pad.29
  Top Layer w12: pad.30 2084.21,1694.21 U7.6
  Bottom Layer w10: pad.29 pad.30
BAT+: C9.2 L1.1 pad.2 R36.2 R41.2 S1.2 U1.5 | length 1683.9
  Top Layer w20: R36.2 434.02,2230 430.04,2233.98 R41.2 430.04,2316.1 442.87,2328.94 448.98,2328.94 450.04,2330 743.28,2330 755,2318.28 755,2301.62 775,2281.62 S1.2 775,2243.19 883.19,2135 1104.72,2135 L1.1 1109.72,2100.63 1100.03,2090.94 1052.68,2090.94 1024.53,2062.8 1023.54,2062.8 1021.73,2060.98 C9.2 ; U1.5 982.05,1835 1012.05,1805 pad.2
  Bottom Layer w20: S1.2 775,2243.19 1040,1978.19 pad.2
BOOT0: pad.33 pad.38 pad.63 pad.75 R22.1 U5.44 | length 1336.1
  Top Layer w10: pad.63 948,1082 948,1123 1000,1175 1000,1260 1013,1273 1013,1308 1035,1330 pad.38 ; pad.33 R22.1
  Top Layer w12: pad.75 875.47,905.47 U5.44
  Bottom Layer w10: pad.75 875,905 1000,905 1015,920 1015,1015 pad.63 ; pad.38 1035,1500 1105,1570 1160,1570 pad.33
CH340_RXD: pad.9 pad.35 pad.37 pad.83 R29.1 U10.3 | length 2097.2
  Top Layer w10: pad.35 pad.37 ; pad.83 1465,1387.29 1470,1382.29 1470,1380 1945,905 R29.1
  Top Layer w12: 405,1585 U10.3
  Bottom Layer w10: pad.9 pad.35 ; pad.37 645,1615 775,1615 815,1655 1360,1655 1390,1625 1390,1544.7 1391,1543.7 1391,1469 1460,1400
CH340_TXD: pad.8 pad.34 pad.36 pad.82 R30.1 U10.2 | length 2085.6
  Top Layer w10: pad.34 pad.36 ; pad.82 1940,970 R30.1
  Top Layer w12: pad.8 U10.2
  Bottom Layer w10: pad.8 pad.34 ; pad.36 760,1635 800,1675 1410,1675 1425,1660 1425,1485 pad.82
DN1: pad.5 pad.7 U10.6 USB1.A7 | length 746.1
  Top Layer w10: pad.7 202.71,1930 207.86,1935.16 USB1.A7 ; pad.5 332.71,1485 337.51,1480.19 340.55,1480.19 370.74,1450 431.71,1450 446.71,1435 U10.6
  Bottom Layer w10: pad.7 202.71,1930 209.38,1936.68 221,1936.68 300,1857.68 300,1517.71 323.68,1494.03 323.68,1481.32 pad.5
DN2: pad.11 pad.14 R31.1 USB1.B7 | length 1479.4
  Top Layer w10: USB1.B7 256.2,1973.62 286.52,1973.62 300.15,1960 314.14,1960 324.14,1970 pad.11 ; pad.14 1195,1364.14 1185,1354.14 1185,1336.34 1190.86,1330.48 1206.25,1330.48 R31.1
  Bottom Layer w10: pad.11 327.71,1960 332.71,1955 354.28,1955 421.79,1887.5 421.79,1868.21 590,1700 590,1415 620,1385 865,1385 895,1415 1162.98,1415 1185,1392.98 1185,1375.86 1195,1365.86 pad.14
DP1: pad.4 pad.6 U10.5 USB1.A6 | length 729.8
  Top Layer w10: 210,1960 215.16,1954.85 USB1.A6 ; pad.4@350,1515 345,1507.29 349.69,1502.6 349.69,1499.34 379.03,1470 431.71,1470 446.71,1485 U10.5
  Bottom Layer w10: pad.6 220.96,1965 320,1865.96 320,1529.26 pad.4@340.45,1508.81
DP2: pad.12 pad.13 R33.1 USB1.B6 | length 1438
  Top Layer w10: USB1.B6 317.77,1915.47 322.29,1920 pad.12 ; R33.1 1143.75,1330.48 1159.14,1330.48 1165,1336.34 1165,1354.14 1155,1364.14 pad.13
  Bottom Layer w10: pad.12 327.71,1930 332.71,1935 346,1935 401.79,1879.21 401.79,1859.93 570,1691.72 570,1406.72 611.72,1365 873.28,1365 903.28,1395 1154.7,1395 1165,1384.7 1165,1375.86 1155,1365.86 pad.13
ESP12_RXD: M1.21 pad.131 pad.139 pad.140 pad.141 pad.142 R24.1 | length 1317.3
  Top Layer w10: pad.141 1795,825 pad.142@1822.5,852.5 ; pad.131 2001.54,1040 R24.1 R24.1@2000,1035 ; pad.140 pad.139
  Bottom Layer w10: pad.141@1795,805 1765,775 1765,639.36 1789.3,615.06 1834.94,615.06 1940,510 pad.140 ; pad.142 1785,890 1785,920 1905,1040 pad.131 ; pad.139 2003.9,340 2200.59,143.31 M1.21@2200.59,138.62
ESP12_TXD: M1.22 pad.133 pad.135 pad.136 pad.137 pad.138 R26.1 | length 1704.6
  Top Layer w10: pad.136 1665,805 pad.135 ; pad.133 1900,1105 R26.1 ; pad.137 pad.138 pad.138@1960,310
  Bottom Layer w10: pad.136 1665,660.62 1910,415.62 pad.137 ; pad.135 1715,850 1730,865 1730,890 1685,935 1685,1020 pad.133 ; pad.138 1960,195 2090,65 2195.47,65 M1.22@2200.59,59.88
GND: C1.1 C2.1 C3.1 C4.1 C5.1 C6.1 C7.2 C9.1 C10.1 C11.1 C12.1 C13.2 C14.2 C15.2 C16.1 C17.1 C18.1 C19.1 C20.1 C21.1 C22.2 D3.K D6.K M1.15 P1.2 P3.6 pad.3 pad.88 pad.89 pad.115 pad.146 pad.147 pad.148 pad.149 pad.150 pad.154 pad.155 pad.156 pad.157 Q1.3 Q4.2 R1.1 R3.1 R7.2 R8.1 R10.1 R23.2 R39.1 R40.1 S1.1 U1.1 U1.3 U2.1 U2.2 U2.3 U2.4 U2.7 U3.3 U3.4 U3.5 U4.9 U4.11 U5.8 U5.23 U5.35 U5.47 U6.4 U7.1 U7.11 U7.15 U7.17 U7.18 U8.1 U9.2 U10.1 USB1.13 USB1.14 USB1.15 USB1.16 USB1.A1B12 | length 2218.3
  Top Layer w10: pad.146 U1.3 ; U5.47 1130.75,846.42 1133.92,849.59 1137.31,849.59 1170,882.28 pad.157 ; U5.35 1171.42,1064.25 1174.59,1061.08 1174.59,1057.69 1207.28,1025 pad.88 ; pad.156 1280,960 pad.89 1343.58,1023.58 U5.23 ; pad.115 1240.84,844.16 1254.51,844.16 1289.33,809.33 1289.33,775.75 U5.8 ; U7.11 2139.53,1879.53 pad.150 2221.35,1895 2227.2,1889.14 2227.2,1876.26 C17.1
  Top Layer w12: pad.154 605,750 900,750 996.42,846.42 U5.47 ; U9.2 pad.3
  Bottom Layer w10: pad.154 735,665 pad.155 ; pad.157 1170,915 pad.156 ; pad.115 1240,995 pad.88 1298.09,996.91 1313.09,996.91 pad.89
HW_INT: R11.1 U4.15 | length 126.9
  Top Layer w12: R11.1 1870.98,2191.54 1912.28,2150.23 U4.15
MPU6050_SCL: pad.18 pad.19 pad.24 pad.42 pad.43 pad.45 pad.151 R13.2 R18.1 R27.2 U2.6 U7.23 | length 2400.4
  Top Layer w10: pad.42 R27.2 ; pad.45@1365,1570 pad.45 1370,1575 pad.43 ; R18.1 1775,1566.54 1775,1595 pad.151 pad.151@1785,1610 ; pad.24 1805,1705 pad.19
  Top Layer w12: R13.2 1710.98,1835 1785.98,1760 pad.19 ; 1874.53,1820.47 U7.23
  Bottom Layer w10: U2.6 730,1175 pad.42 765,1207.29 807.29,1165 925,1165 972,1212 1217,1212 1280,1275 1280,1357 1234.44,1402.55 1234.44,1439.44 pad.45 ; pad.43 1515,1575 1680,1410 1725,1410 1755,1440 1805.64,1505.65 1805.64,1509.92 1805.64,1510.04 1805,1535.05 1805,1612.53 ; pad.151 1786.91,1606.91 1799.39,1606.91 1805,1612.53 ; pad.24 1805,1612.53
  Bottom Layer w12: pad.19 1860,1762.16 1870,1772.16 pad.18
MPU6050_SDA: pad.31 pad.32 pad.41 pad.44 pad.46 pad.47 pad.50 pad.51 pad.52 R15.1 R16.1 R28.2 U2.5 U7.24 | length 2604.5
  Top Layer w10: pad.52 pad.51 ; pad.41 817.52,1260 826.54,1269.02 R28.2 ; pad.50 1195,1425 pad.47 ; pad.46 pad.44 ; R16.1 1773.46,1500.98 1830,1557.52 pad.31 ; pad.32 1906.93,1760 1947.72,1800.79 U7.24
  Top Layer w12: R15.1 1770.98,1833.27 1803.46,1800.79 U7.24@1947.72,1800.79
  Bottom Layer w10: pad.52 675,1260 pad.41 745,1225 U2.5 ; pad.51 660,1455 pad.50 ; pad.47 pad.46 ; pad.44 1510,1535 1660,1385 1730,1385 1830,1485 pad.31 1830,1685 pad.32
NetC7_1: C7.1 U7.20 | length 61.5
  Top Layer w12: C7.1 1895.24,1879.76 1956.02,1879.76 U7.20
NetC8_1: C8.1 U4.12 | length 107.7
  Top Layer w12: C8.1 1981.54,2231.96 2000.52,2212.97 U4.12
NetC8_2: C8.2 U4.8 | length 256.4
  Top Layer w12: C8.2 2100,2310 2125,2285 2125,2196.63 2117.97,2189.6 U4.8
NetC12_2: C12.2 U4.10 | length 48.3
  Top Layer w12: U4.10 2039.93,2210.29 2039.93,2222.33 2048.27,2230.67 C12.2
NetC15_1: C15.1 U10.4 | length 174.7
  Top Layer w12: C15.1 305.98,1563.27 319.25,1550 320,1550 335,1535 U10.4
NetC17_2: C17.2 U7.10 | length 91
  Top Layer w12: U7.10 2190.83,1859.84 2200,1869.02 C17.2
NetC18_2: C18.2 U10.7 Y1.1 | length 514.3
  Top Layer w12: C18.2 56.73,1603.27 178.27,1603.27 Y1.1 180,1590 385,1385 U10.7
NetC19_2: C19.2 U10.8 Y1.2 | length 442.6
  Top Layer w12: C19.2 55.77,1405.77 179.23,1405.77 Y1.2 250,1335 U10.8
NetC20_2: C20.2 U5.6 Y2.1 | length 374.6
  Top Layer w10: C20.2 Y2.1
  Top Layer w12: U5.6 1250.65,775.06 1250.65,534.35 Y2.1
NetC21_2: C21.2 U5.5 Y2.2 | length 441.2
  Top Layer w10: C21.2 Y2.2
  Top Layer w12: Y2.2 1230.47,695.47 U5.5
NetC22_1: C22.1 R36.1 R37.2 R39.2 | length 220.3
  Top Layer w12: R39.2 390.8,2235 404.01,2221.78 404.01,2219.41 421.08,2202.35 429.19,2202.35 R36.1 434.02,2196.54 405.81,2168.33 405.81,2145.81 C22.1 401.63,2138.37 401.63,2086.63 R37.2
NetD1_A: D1.A D2.A R6.2 | length 408.5
  Top Layer w10: R6.2 930,1735 970,1775 1075,1775 1140,1840 D2.A D1.A
NetD1_K: D1.K U1.7 | length 125.3
  Top Layer w10: U1.7 982.05,1935 1002.05,1955 D1.K
NetD2_K: D2.K U1.6 | length 119.1
  Top Layer w10: U1.6 1074.37,1885 D2.K
NetD3_A: D3.A R17.2 | length 106.5
  Top Layer w12: R17.2 1465.67,2290 1479.68,2304.02 D3.A
NetD4_2: D4.2 Q2.3 R19.1 | length 354.7
  Top Layer w12: D4.2 D4.2@979.1,1490 ; Q2.3 989.21,1481.67 980.89,1490 1118.2,1627.32 1118.2,1647.46 1124.02,1653.27 R19.1
NetD5_2: D5.2 U8.3 U9.1 U9.3 | length 425
  Top Layer w12: U8.3 1533.78,2034.45 1597.57,1970.65 1597.57,1952.96 1600.53,1950 D5.2 1610.31,1947.9 1610.31,1879.69 ; U9.3 1537.6,1892.97 1544.63,1900 1590,1900 1610.31,1879.69 ; U9.1 1612.4,1867.6 1610.31,1869.69 1610.31,1879.69
NetD6_A: D6.A R32.2 | length 113.3
  Top Layer w12: R32.2 D6.A
NetL1_2: L1.2 U6.5 | length 124.4
  Top Layer w12: L1.2 1200.28,2176.43 1213.97,2190.12 U6.5
NetM1_1: M1.1 R2.2 | length 105.8
  Bottom Layer w10: R2.2 1625.67,60 M1.1@1625.79,59.88
NetM1_3: M1.3 R5.2 | length 132
  Bottom Layer w10: R5.2 1646.77,220 M1.3@1649.41,217.36
NetM1_16: M1.16 R7.1 | length 116.2
  Bottom Layer w10: M1.16@2200.59,532.32 2204.8,536.54 R7.1
NetM1_18: M1.18 Q1.2 R4.1 R10.2 | length 1072.7
  Bottom Layer w10: Q1.2 R4.1 1346.54,114.06 1379.02,146.54 R10.2 1545.31,146.54 1572.04,173.27 1773.27,173.27 1974.84,374.84 M1.18@2200.59,374.84
NetP1_1: P1.1 S1.3 | length 194.3
  Top Layer w15: S1.3 1115,2255 P1.1
NetQ1_1: Q1.1 R9.1 | length 55.5
  Bottom Layer w10: Q1.1 1290,144.8 R9.1
NetQ2_1: Q2.1 R21.2 | length 536.9
  Top Layer w12: Q2.1 883.19,1415 795,1415 772.47,1437.53 772.47,1487.47 938.27,1653.27 R21.2
NetQ2_2: pad.48 pad.49 Q2.2 R20.1 U10.11 | length 1003.6
  Top Layer w12: U10.11 725,1435 827.4,1332.6 Q2.2 ; pad.48@1105,1370 1105,1450 1265,1610 1433.27,1610 R20.1
  Bottom Layer w10: pad.49 948.65,1340 973.65,1365 pad.48
NetQ3_1: Q3.1 R20.2 | length 68.2
  Top Layer w12: Q3.1 1428.15,1647.6 1434.02,1641.73 R20.2
NetQ3_3: Q3.3 R22.2 | length 81.5
  Top Layer w12: R22.2 1190.87,1685.87 1269.92,1685.87 Q3.3
NetQ4_1: Q4.1 R38.2 R40.2 | length 291.8
  Top Layer w12: R38.2 85.77,2175.77 179.23,2175.77 R40.2 180,2175.98 140,2215.98 140,2302.97 147.03,2310 178.23,2310 Q4.1
NetQ4_3: Q4.3 R41.1 | length 111.6
  Top Layer w10: Q4.3 336.06,2280 359.96,2303.9 R41.1
NetR1_2: R1.2 U1.2 | length 71.8
  Top Layer w10: R1.2 690.98,1945 700.98,1935 U1.2
NetR3_2: R3.2 USB1.B5 | length 148.4
  Top Layer w10: USB1.B5 402.16,1876.1 R3.2
NetR8_2: R8.2 USB1.A5 | length 147
  Top Layer w10: USB1.A5 401.14,1994.61 R8.2
NetR21_1: R21.1 U10.12 | length 441.6
  Top Layer w12: U10.12 725.62,1485 927.35,1686.73 R21.1
NetR23_1: R23.1 U7.9 | length 101.4
  Top Layer w12: U7.9 2165.83,1840.16 2200,1805.98 R23.1
NetR25_1: R25.1 U7.12 | length 99
  Top Layer w12: U7.12 2121.03,1899.21 2151.82,1930 R25.1
PA0: P2.1 U5.10 | length 1202
  Top Layer w12: U5.10 1328.9,696.1 1395,630 1395,627.03 1402.03,620 1515,620 1565,670 2250,670 2275,695 2275,800 P2.1
PA1: P2.3 pad.20 pad.59 R37.1 U5.11 | length 3893.6
  Top Layer w10: R37.1 465,2085 pad.20 ; pad.59 1505,1500 1420,1415 1420,1382.33 1957.33,845 2100,845 2115,860 2235,860 P2.3
  Top Layer w12: U5.11 1349.07,775.06 1349.07,730.93 1390,690 2170,690 2225,745 2225,850 2235,860
  Bottom Layer w10: pad.20 520,1795 570,1745 820,1745 865,1700 1485,1700 1505,1680 pad.59
PA2: P2.5 pad.126 pad.132 R24.2 U5.12 | length 1119
  Top Layer w10: pad.126 2021.7,1010 2033.19,1021.49 2033.19,1028.19 R24.2 2040,1035.98 2046.81,1042.8 2050.46,1042.8 2052.67,1045 2126.54,1045 2127.06,1045.53 2239.47,1045.53 P2.5
  Top Layer w12: U5.12 1368.27,746.61 1404.87,710 1630,710 1820,900 pad.132
  Bottom Layer w10: pad.132@1824.2,919.2 1915,1010 pad.126
PA3: P2.7 pad.125 pad.127 R26.2 U5.13 | length 1050.9
  Top Layer w10: 1500,785 1605,785 pad.127 ; pad.125 2008.43,1070 2029.92,1091.49 2029.92,1098.19 R26.2 2036.73,1104.02 2043.54,1097.2 2044.53,1097.2 2080.2,1061.53 2236.53,1061.53 P2.7
  Top Layer w12: U5.13 1448.39,826.73 1490.13,785 1500,785
  Bottom Layer w10: pad.127 pad.125
PA4: P2.9 pad.128 pad.129 pad.130 U5.14 | length 1135.8
  Top Layer w10: pad.129 pad.130@2110,1185
  Top Layer w12: U5.14 1488.58,846.42 1510,825 pad.128
  Bottom Layer w10: pad.128 1840,825 2055,1040 pad.129 ; pad.130 2150,1150 2210,1150 2235,1175 2247.03,1175 2277.03,1205 P2.9
PA5: P2.11 pad.61 pad.123 pad.124 R32.1 U5.15 | length 1809.3
  Top Layer w10: R32.1 1725.08,1643.19 1725.08,1635.86 1734.73,1626.2 1768.1,1626.2 1771.89,1630 1830,1630 1880,1580 pad.61 ; pad.124 1937.71,1155 1942.71,1150 2210,1150 2230,1170 2230,1255 P2.11
  Top Layer w12: U5.15 1419.94,865.61 1449.86,865.61 1450.47,865 1635,865 pad.123
  Bottom Layer w10: pad.123 1925,1155 pad.124 ; pad.61 2155,1360 2225,1360 P2.11
PA6: P2.13 pad.120 pad.121 pad.143 pad.144 pad.145 R9.2 U5.16 | length 2223.7
  Top Layer w10: pad.143 1485,395 pad.144 ; pad.145 1687.5,1060 1732.5,1015 pad.120 ; pad.121 2090,1220 2125,1255 2200,1255 2227.5,1282.5 2227.5,1311.67 2280,1364.17 P2.13
  Top Layer w12: U5.16 1589.15,885.79 1605.79,885.79 pad.120
  Bottom Layer w10: R9.2 1290.98,226.73 1297.8,233.54 1297.8,234.53 1425,361.73 pad.143 ; pad.144 1550,460 1550,875 1641,966 1641,1026 1675,1060 pad.145 ; pad.120 1900,1180 1920,1180 1939,1199 2024,1199 pad.121
PA7: P2.15 pad.26 pad.28 pad.118 pad.119 R25.2 U5.17 | length 1816
  Top Layer w10: pad.119 2060,1245 2070,1255 2070,1315 2115,1360 2214.14,1360 2239.47,1385.33 2239.47,1464.47 P2.15 2282.5,1507.5 2282.5,1747.5 pad.28 ; R25.2 2233.46,1929.02 2280,1882.48 pad.26
  Top Layer w12: U5.17 1580.47,905.47 1660,985 1660,1070 pad.118
  Bottom Layer w10: pad.118 1610,1170 1655,1215 1985,1215 2015,1245 pad.119 ; pad.26 pad.28
PA8: P2.2 pad.76 pad.122 U5.29 | length 1214.4
  Top Layer w10: pad.122 1425,1240 1455,1270 1509.7,1270 1974.7,805 P2.2
  Top Layer w12: U5.29 1289.53,1194.53 pad.76
  Bottom Layer w10: pad.76 1367.5,1230 1377.5,1240 pad.122
PA9: P2.4 pad.80 R29.2 U5.30 | length 1535.9
  Top Layer w10: R29.2 P2.4
  Top Layer w12: U5.30 1269.84,1219.39 1310.46,1260 pad.80
  Bottom Layer w10: pad.80 1390,1260 1438.5,1308.5 2041.5,1308.5 2076,1274 2076,1009 P2.4
PA10: P2.6 pad.81 R30.2 U5.31 | length 1499.8
  Top Layer w10: R30.2 2145,970 P2.6
  Top Layer w12: U5.31 1250.16,1225.16 1310,1285 1355,1285 pad.81
  Bottom Layer w10: pad.81 1394.5,1324.5 2050.5,1324.5 2085.21,1289.79 2092,1283 2092,1093 P2.6
PA11: R31.2 U5.32 | length 243.4
  Top Layer w10: R31.2 1186.51,1293.27 1183,1289.75 1183,1207 1228.63,1161.37 1228.63,1129.76 1229.51,1128.88 1229.51,1095.41 U5.32
PA12: R33.2 R34.2 U5.33 | length 309.1
  Top Layer w10: R34.2 1075.87,1294.13 1139.13,1294.13 R33.2 1163.49,1293.27 1167,1289.75 1167,1200.37 1212.63,1154.74 1212.63,1129.76 1211.75,1128.88 1211.75,1095.41 U5.33
PA13: P2.12 pad.68 pad.69 pad.78 U5.34 | length 1280.4
  Top Layer w10: pad.69 1230,1245 1300,1315 pad.78
  Top Layer w12: pad.68 1140,1180.55 1190.61,1129.94 1190.61,1094.94 U5.34
  Bottom Layer w10: pad.68 1195,1235 pad.69 ; pad.78 1355.3,1315 1405.3,1365 2120,1365 P2.12
PA14: P2.14 pad.64 pad.96 pad.97 pad.103 U5.37 | length 1507.2
  Top Layer w10: pad.64@1000,1125 1000,1113.9 1070.63,1043.27 U5.37 ; pad.103@1995,1270 2000,1275 pad.97 ; pad.96 2175,1400 P2.14
  Bottom Layer w10: pad.64 1016,1141 1089,1141 1100,1130 1428,1130 1520,1222 1532,1234 1954,1234 pad.103 ; pad.97 pad.96
PA15: P2.16 pad.65 pad.95 U5.38 | length 1653.3
  Top Layer w10: pad.95 2035,1440 2100,1505 P2.16
  Top Layer w12: pad.65 975,1095 1046.42,1023.58 U5.38
  Bottom Layer w10: pad.65 975,1140 1015,1180 1405,1180 1517.5,1292.5 2027.5,1292.5 pad.95
PB0: P4.1 pad.109 pad.110 U5.18 | length 2244.7
  Top Layer w10: P4.1 330,415 pad.109
  Top Layer w12: U5.18 1540.16,925.16 pad.110
  Bottom Layer w10: pad.109 340,545 500,705 1015,705 1155,565 1155,475 1180,450 1280,450 1385,555 1385,910 1400,925 1535,925 1560,950 pad.110
PB1: P4.3 pad.17 pad.108 R38.1 U5.19 | length 3939.6
  Top Layer w12: R38.1 85.98,2210 115,2239.02 pad.17 ; U5.19 1524.84,944.84 pad.108@1560,980
  Bottom Layer w10: P4.3 249.39,524.39 284.39,524.39 485,725 1095,725 1240,580 1345,580 1360,595 1360,900 1360.86,900.86 1360.86,915.86 1390,945 1520,945 pad.108
  Bottom Layer w12: pad.17 115,1735 75,1695 65,1695 40,1670 40,605 75,570 185,570 P4.3
PB2: P4.5 pad.107 U5.20 | length 2096.4
  Top Layer w12: U5.20 1501.7,964.53 1567.18,1030 pad.107
  Bottom Layer w10: P4.5 330,615 456,741 596,741 600,745 1150,745 1170,725 1170,675 1235,610 1320,610 1330,620 1330,920 1375,965 1505,965 1570,1030 pad.107
PB3: P4.7 pad.72 U5.39 | length 1094.4
  Top Layer w12: pad.72 333.9,1003.9 U5.39
  Bottom Layer w10: P4.7 325,800 pad.72
PB4: P4.9 pad.73 pad.74 U5.40 | length 1026.1
  Top Layer w10: P4.9 325,815 380,870 pad.74
  Top Layer w12: pad.73@358.29,985.9 1069.92,985.9 1071.61,984.21 U5.40
  Bottom Layer w10: pad.73 380,955 pad.74
PB5: P4.11 U5.41 | length 881.5
  Top Layer w10: P4.11 330,915 380,965
  Top Layer w12: 380,965 1100.08,965 U5.41
PB6: P4.13 pad.55 pad.56 R27.1 U5.42 | length 1382.6
  Top Layer w10: P4.13 245.9,1020.9 825.9,1020.9 858.37,1053.37 858.37,1208.37 R27.1
  Top Layer w12: pad.55 750,945 915,945 915.16,944.84 U5.42
  Bottom Layer w10: pad.55 pad.56
PB7: P4.15 pad.57 pad.58 R28.1 U5.43 | length 1451.9
  Top Layer w10: P4.15 240,1160 360,1280 769.55,1280 783.35,1293.8 842.9,1293.8 853.19,1283.51 853.19,1276.81 R28.1 860,1269.02 900,1229.02 pad.57
  Top Layer w12: pad.58 810,925 855,925 855.16,925.16 U5.43
  Bottom Layer w10: pad.58 900,1015 pad.57
PB8: P4.2 U5.45 | length 1374.8
  Top Layer w12: P4.2 140,365 167.23,337.77 312.77,337.77 375,400 375,615 590,830 850,830 905.79,885.79 U5.45
PB9: P4.4 U5.46 | length 1558.5
  Top Layer w12: P4.4 89.5,464.5 89.5,360.5 130.23,319.77 339.77,319.77 405,385 405,605 590,790 885,790 961.1,866.1 U5.46
PB10: P4.6 pad.104 pad.105 pad.106 U5.21 | length 1872.9
  Top Layer w10: pad.106 411,811 pad.105
  Top Layer w12: U5.21 1484.21,984.21 pad.104
  Bottom Layer w10: P4.6 185,660 260,660 pad.106 ; pad.105 1066,811 1122.5,867.5 1122.5,1032.5 1150,1060 pad.104
PB11: P4.8 pad.101 pad.102 U5.22 | length 1927
  Top Layer w10: P4.8 141.84,713.16 184.53,713.16 223.21,674.47 359.47,674.47 pad.101
  Top Layer w12: U5.22 1471.88,1003.9 1478.91,1010.93 1478.91,1023.91 pad.102
  Bottom Layer w10: pad.101 570,760 579,769 1211,769 1220,760 1220,670 1255,635 1305,635 1314,644 1314,681 1300,695 1300,930 1370,1000 1455,1000 pad.102
PB12: P4.10 pad.98 pad.99 U5.25 | length 1931.1
  Top Layer w10: P4.10 185,770 325,770 390,835 pad.99
  Top Layer w12: U5.25 1368.27,1123.39 1444.87,1200 1475.5,1200 1496.99,1178.52 1496.99,1163.01 pad.98
  Bottom Layer w10: pad.99 555,830 1025,830 1095,900 1095,1050 1135,1090 1415,1090 1429,1076 1506,1076 1520,1090 pad.98
PB13: P4.12 pad.84 pad.86 U5.26 | length 1999
  Top Layer w10: P4.12 141.84,913.16 184.53,913.16 223.21,874.47 329.47,874.47 pad.86
  Top Layer w12: U5.26 1349.07,1094.94 1349.07,1134.07 1450,1235 1465.96,1235 1550,1150.96 1550,1120 1540,1110 pad.84
  Bottom Layer w10: pad.86 590,895 635,850 875,850 900,875 1020,875 1050,905 1050,1050 1110,1110 pad.84
PB14: P4.14 pad.70 pad.71 U5.27 | length 1484.3
  Top Layer w10: P4.14 199.47,1074.47 514.47,1074.47 580,1140 pad.70
  Top Layer w12: U5.27 1328.9,1143.9 pad.71@1397.5,1212.5
  Bottom Layer w10: pad.70 925,1140 981,1196 1376,1196 pad.71
PB15: P4.16 pad.66 pad.67 U5.28 | length 1692.6
  Top Layer w10: P4.16 140,1175 265,1300 755,1300 770,1315 852.5,1315 872.5,1295 pad.66@915,1295 ; pad.67 1395,1340 1415,1320 1415,1275
  Top Layer w12: U5.28 1309.21,1169.21 1415,1275
  Bottom Layer w10: pad.66 1205,1295 pad.67
PC13: P3.1 U5.2 | length 1105.5
  Top Layer w12: P3.1 515,610 620,715 1145.87,715 1170.93,740.06 1170.93,775.06 U5.2
PC14: P3.3 U5.3 | length 1374.1
  Top Layer w12: P3.3 415,237.27 445,207.27 445,207.03 452.03,200 585,200 610,225 610,320 550,380 550,605 630,685 1141.32,685 1190.61,734.29 1190.61,775.06 U5.3
PC15: P3.5 pad.87 U5.4 | length 1294.9
  Top Layer w12: pad.87 585,605 645,665 1155,665 1210.79,720.79 U5.4
  Bottom Layer w10: P3.5 370,305 470,305 485,320 485,385 515,415 pad.87
Q_SCL: pad.16 pad.22 pad.23 R14.2 R18.2 U3.8 U4.1 | length 1004.5
  Top Layer w10: U3.8 1646.57,1565 R18.2 pad.22 ; pad.23 1711.91,1453.09 1711.91,1438.09 1725,1425 R14.2 R14.2@1750,1425.98
  Top Layer w12: pad.16 1953.48,2060 2000.52,2107.05 U4.1
  Bottom Layer w10: pad.23 1711.91,1456.91 1730.19,1456.91 1740,1466.73 pad.22
  Bottom Layer w12: pad.22 1740,1870 pad.16
Q_SDA: pad.15 pad.21 R12.2 R16.2 U3.7 U4.16 | length 1069.8
  Top Layer w10: U3.7 1644.21,1505 pad.21 ; R16.2 1708.79,1500 1703.79,1505 pad.21 ; R12.2 1750,1360.98 1685,1425.98 1685,1490 pad.21
  Top Layer w12: pad.15 1900.55,2130.55 U4.16
  Bottom Layer w12: pad.21 1700,1930 pad.15
RESET: D4.1 pad.62 pad.85 pad.90 pad.91 U5.7 | length 2225.9
  Top Layer w10: pad.91 730,865 pad.85 ; D4.1@886.79,1490 894.47,1490 898.43,1486.04 898.43,1478.37 950,1426.79 950,1155 930,1135 930,1055 pad.62
  Top Layer w12: U5.7 1269.84,675.16 pad.90
  Bottom Layer w10: pad.91 480,865 449.14,834.14 449.14,825.86 490,785 1259.14,785 1265,779.14 1265,680 pad.90 ; pad.85 805,885 845,925 920,925 950,955 pad.62
VBUS: F1.1 USB1.A4B9 USB1.B4A9 | length 492
  Top Layer w15: USB1.A4B9 250.98,2037.15 212.15,2037.15 170,1995 170,1892.2 209.35,1852.86 250.98,1852.86 USB1.B4A9 368.92,1848.55 415.04,1802.42 F1.1
pads on no net: M1.2 M1.4 M1.5 M1.6 M1.7 M1.8 M1.9 M1.10 M1.11 M1.12 M1.13 M1.14 M1.17 M1.19 M1.20 P2.8 P2.10 U1.0 U3.6 U4.3 U4.4 U4.5 U4.6 U4.7 U4.14 U6.3 U7.0 U7.2 U7.3 U7.4 U7.5 U7.14 U7.16 U7.19 U7.21 U7.22 U8.4 U9.4 U10.9 U10.10 U10.13 U10.14 U10.15 USB1. USB1.A8 USB1.B1A12 USB1.B8
copper on no net: | length 27.4
  Top Layer w10: 2156.73,1195 2166.73,1205 2180,1205

## Polygon pours and split planes (outlines as drawn)
GND on Bottom Layer "Top Layer-No Net1" (solid, pour order 1): -5.01,78.74 cw(c0,78.74) -4.98,79.37 cw(c0,80) -5.01,80 -5.01,2285 cw(c0,2285) -4.99,2285.5 cw(c78.74,2283.46) 76.71,2367.2 cw(c77.2,2362.2) 77.2,2367.22 2283.46,2367.22 cw(c2283.46,2283.46) 2367.22,2283.46 cw(c2362.2,2283.46) 2367.22,2283.43 2367.22,77.2 cw(c2362.2,77.2) 2367.2,76.71 cw(c2283.46,78.74) 2285.5,-4.99 cw(c2285,0) 2285,-5.01 80,-5.01 cw(c80,0) 79.37,-4.98 cw(c78.74,0) 78.74,-5.01 cw(c78.74,78.74)